# EAGLE board DCCoupler_Low_Pressure_v2 (EAGLE 9.6.2)
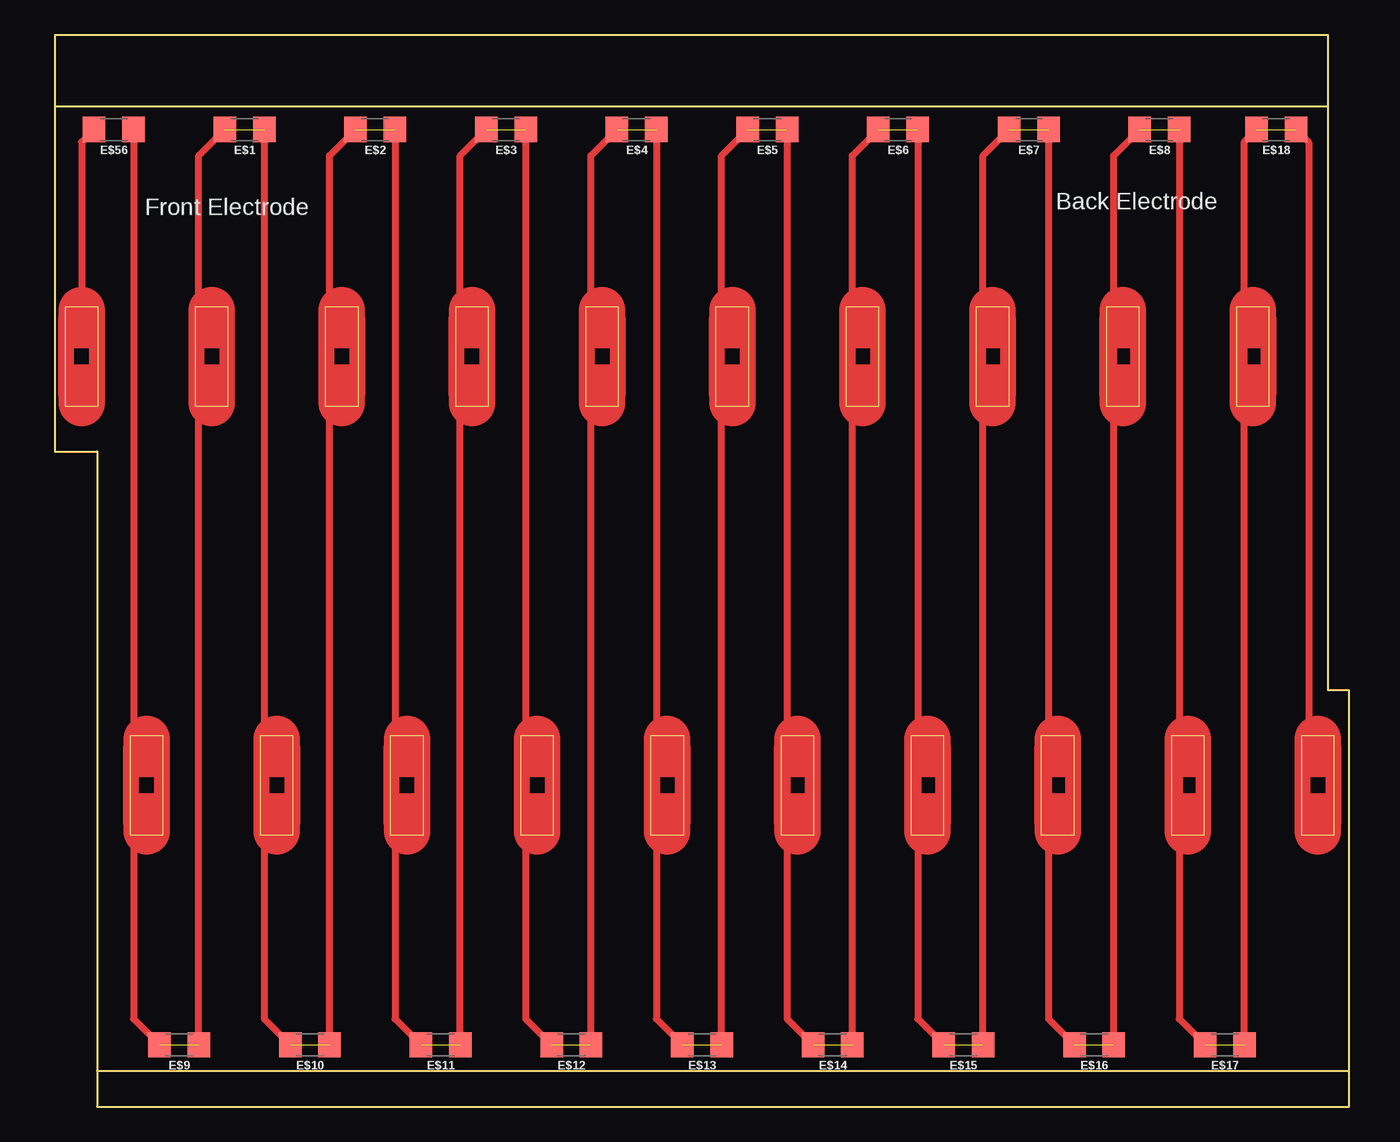
[diagram p0: board, top side]

Size 92.09 x 76.24 mm. Coordinates in mm from the lower left corner, seen from the top.
Outline: 90.6,76.24 0,76.24 0,46.62 3,46.62 3,0 92.09,0 92.09,29.62 90.6,29.62 90.6,76.24
Copper layers (1*16): Top 0.035mm / dielectric 1.5mm / Bottom 0.035mm
Design rules "default": minimum track width 10mil, minimum drill 24mil, track to track 8mil, track to pad 8mil, pad to pad 8mil, via to via 8mil, smd to smd 8mil, copper to edge 40mil, drill to drill 8mil, minimum pad ring 10mil, minimum via ring 8mil, stop-mask expansion 4mil, vias tented up to drill 0mil, thermal gap 10mil
Milling: 8 lines

## Footprints (pad centres in the part's own frame; a part is rotated, then mirrored left to right if it is on the bottom)
1206 = smd 1.6 x 1.8: 1 -1.4,0; 2 1.4,0

## Placement (x,y rotation side)
E$1  [1206]  13.49,69.52 180 top
E$2  [1206]  22.79,69.52 180 top
E$3  [1206]  32.09,69.52 180 top
E$4  [1206]  41.39,69.52 180 top
E$5  [1206]  50.69,69.52 180 top
E$6  [1206]  59.99,69.52 180 top
E$7  [1206]  69.29,69.52 180 top
E$8  [1206]  78.59,69.52 180 top
E$9  [1206]  8.84,4.39 180 top
E$10  [1206]  18.14,4.39 180 top
E$11  [1206]  27.44,4.39 180 top
E$12  [1206]  36.74,4.39 180 top
E$13  [1206]  46.04,4.39 180 top
E$14  [1206]  55.34,4.39 180 top
E$15  [1206]  64.64,4.39 180 top
E$16  [1206]  73.94,4.39 180 top
E$17  [1206]  83.24,4.39 180 top
E$18  [1206]  86.89,69.52 180 top
E$56  [1206]  4.19,69.52 180 top
S$1  [GAAEXTENSIONS_LP]  11.16,53.37 90 top
S$2  [GAAEXTENSIONS_LP]  1.9,53.37 90 top
S$3  [GAAEXTENSIONS_LP]  6.53,22.87 90 top
S$4  [GAAEXTENSIONS_LP]  20.42,53.37 90 top
S$5  [GAAEXTENSIONS_LP]  29.68,53.37 90 top
S$6  [GAAEXTENSIONS_LP]  38.94,53.37 90 top
S$7  [GAAEXTENSIONS_LP]  48.2,53.37 90 top
S$8  [GAAEXTENSIONS_LP]  48.2,53.37 90 top
S$9  [GAAEXTENSIONS_LP]  57.46,53.37 90 top
S$10  [GAAEXTENSIONS_LP]  66.72,53.37 90 top
S$11  [GAAEXTENSIONS_LP]  15.79,22.87 90 top
S$12  [GAAEXTENSIONS_LP]  25.05,22.87 90 top
S$13  [GAAEXTENSIONS_LP]  75.98,53.37 90 top
S$14  [GAAEXTENSIONS_LP]  34.31,22.87 90 top
S$15  [GAAEXTENSIONS_LP]  43.57,22.87 90 top
S$16  [GAAEXTENSIONS_LP]  52.83,22.87 90 top
S$17  [GAAEXTENSIONS_LP]  62.09,22.87 90 top
S$18  [GAAEXTENSIONS_LP]  71.35,22.87 90 top
S$19  [GAAEXTENSIONS_LP]  80.61,22.87 90 top
S$20  [GAAEXTENSIONS_LP]  89.87,22.87 90 top
S$21  [GAAEXTENSIONS_LP]  85.24,53.37 90 top

## Library data of the parts
E$1-E$18 E$56 = SparkFun-Resistors
S$1-S$21 = CouplerDC_v2

## Nets
S$1: E$56.2
S$13: E$1.1 E$1.2 E$2.1 E$2.2 E$3.1 E$3.2 E$4.1 E$4.2 E$5.1 E$5.2 E$6.1 E$6.2 E$7.1 E$7.2 E$8.1 E$8.2 E$9.1 E$9.2 E$10.1 E$10.2 E$11.1 E$11.2 E$12.1 E$12.2 E$13.1 E$13.2 E$14.1 E$14.2 E$15.1 E$15.2 E$16.1 E$16.2 E$17.1 E$17.2 E$18.1 E$18.2 E$56.1

## Tracks (layer width: path | path; a pad name or v marks a point on that pad's centre or on a via)
S$1
  Top 0.508: 2.8,69.02 E$56.2 1.9,68.62 1.9,57.42
S$13  (18 unrouted)
  Top 0.508: E$9.2 5.59,6.24 E$56.1 5.09,69.02 | E$9.1 10.24,67.67 E$1.2 | E$1.1 14.89,6.24 E$10.2 | E$10.1 19.55,67.67 E$2.2 | E$2.1 24.2,6.24 E$11.2 | E$11.1 28.84,67.67 E$3.2 | E$3.1 33.49,6.24 E$12.2 | E$12.1 38.15,67.67 E$4.2 | E$4.1 42.8,6.24 E$13.2 | E$13.1 47.45,67.67 E$5.2 | E$5.1 52.09,6.24 E$14.2 | E$14.1 56.74,67.67 E$6.2 | E$6.1 61.4,6.24 E$15.2 | E$15.1 66.05,67.67 E$7.2 | E$7.1 70.69,6.24 E$16.2 | E$16.1 75.34,67.67 E$8.2 | E$8.1 80,6.24 E$17.2 | E$17.1 84.64,68.67 E$18.2 | E$18.1 89.2,68.61 89.2,26.87

## Text on the board
tPlace: Back Electrode | Front Electrode